# Allegro board C000PD028-HI3521DV200-CUSTOM-A01.brd
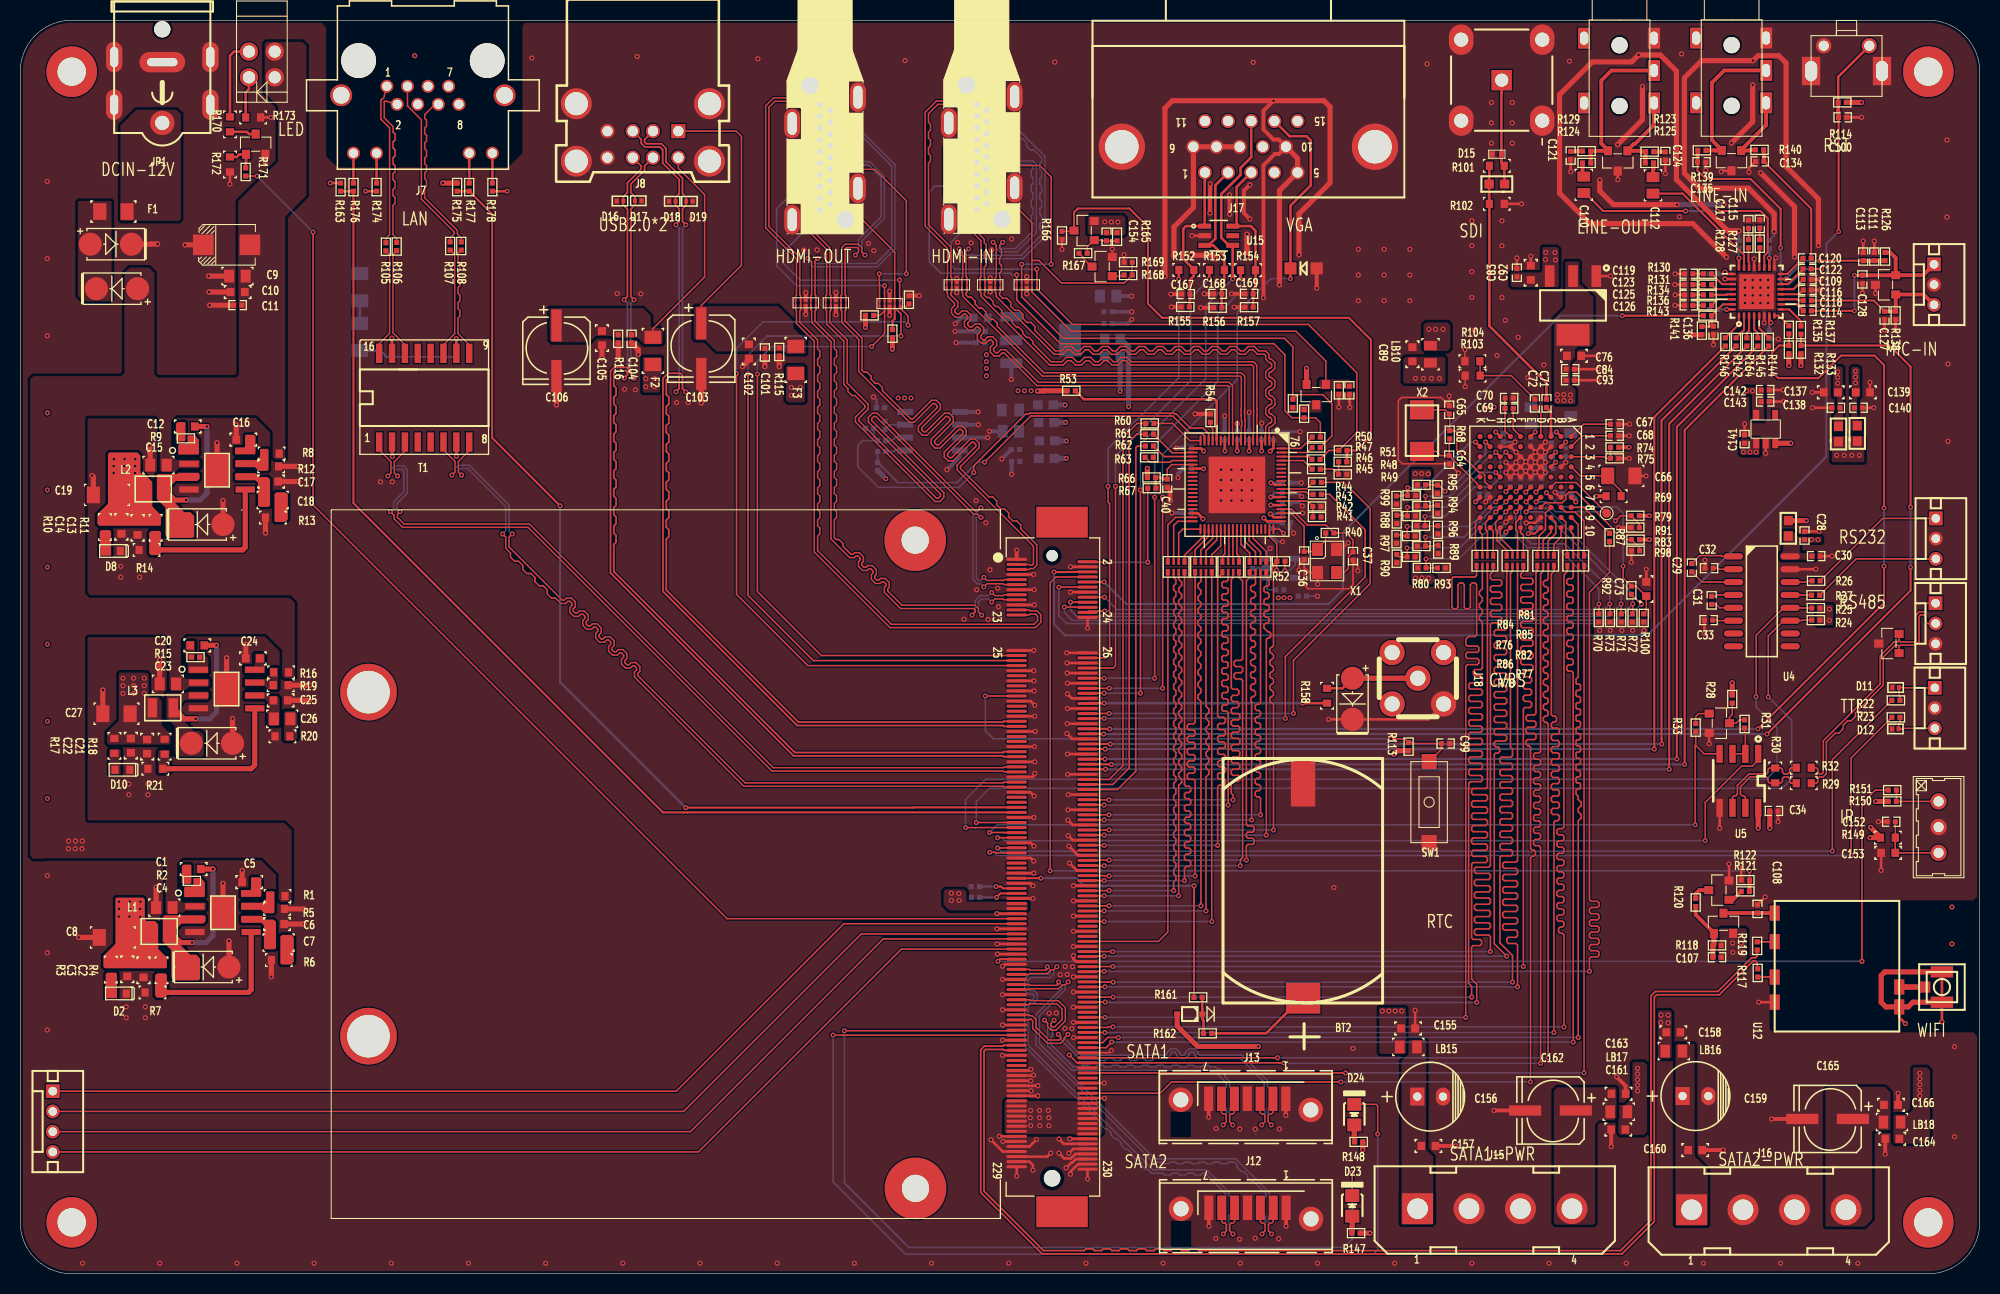
[diagram p0: board, top side]
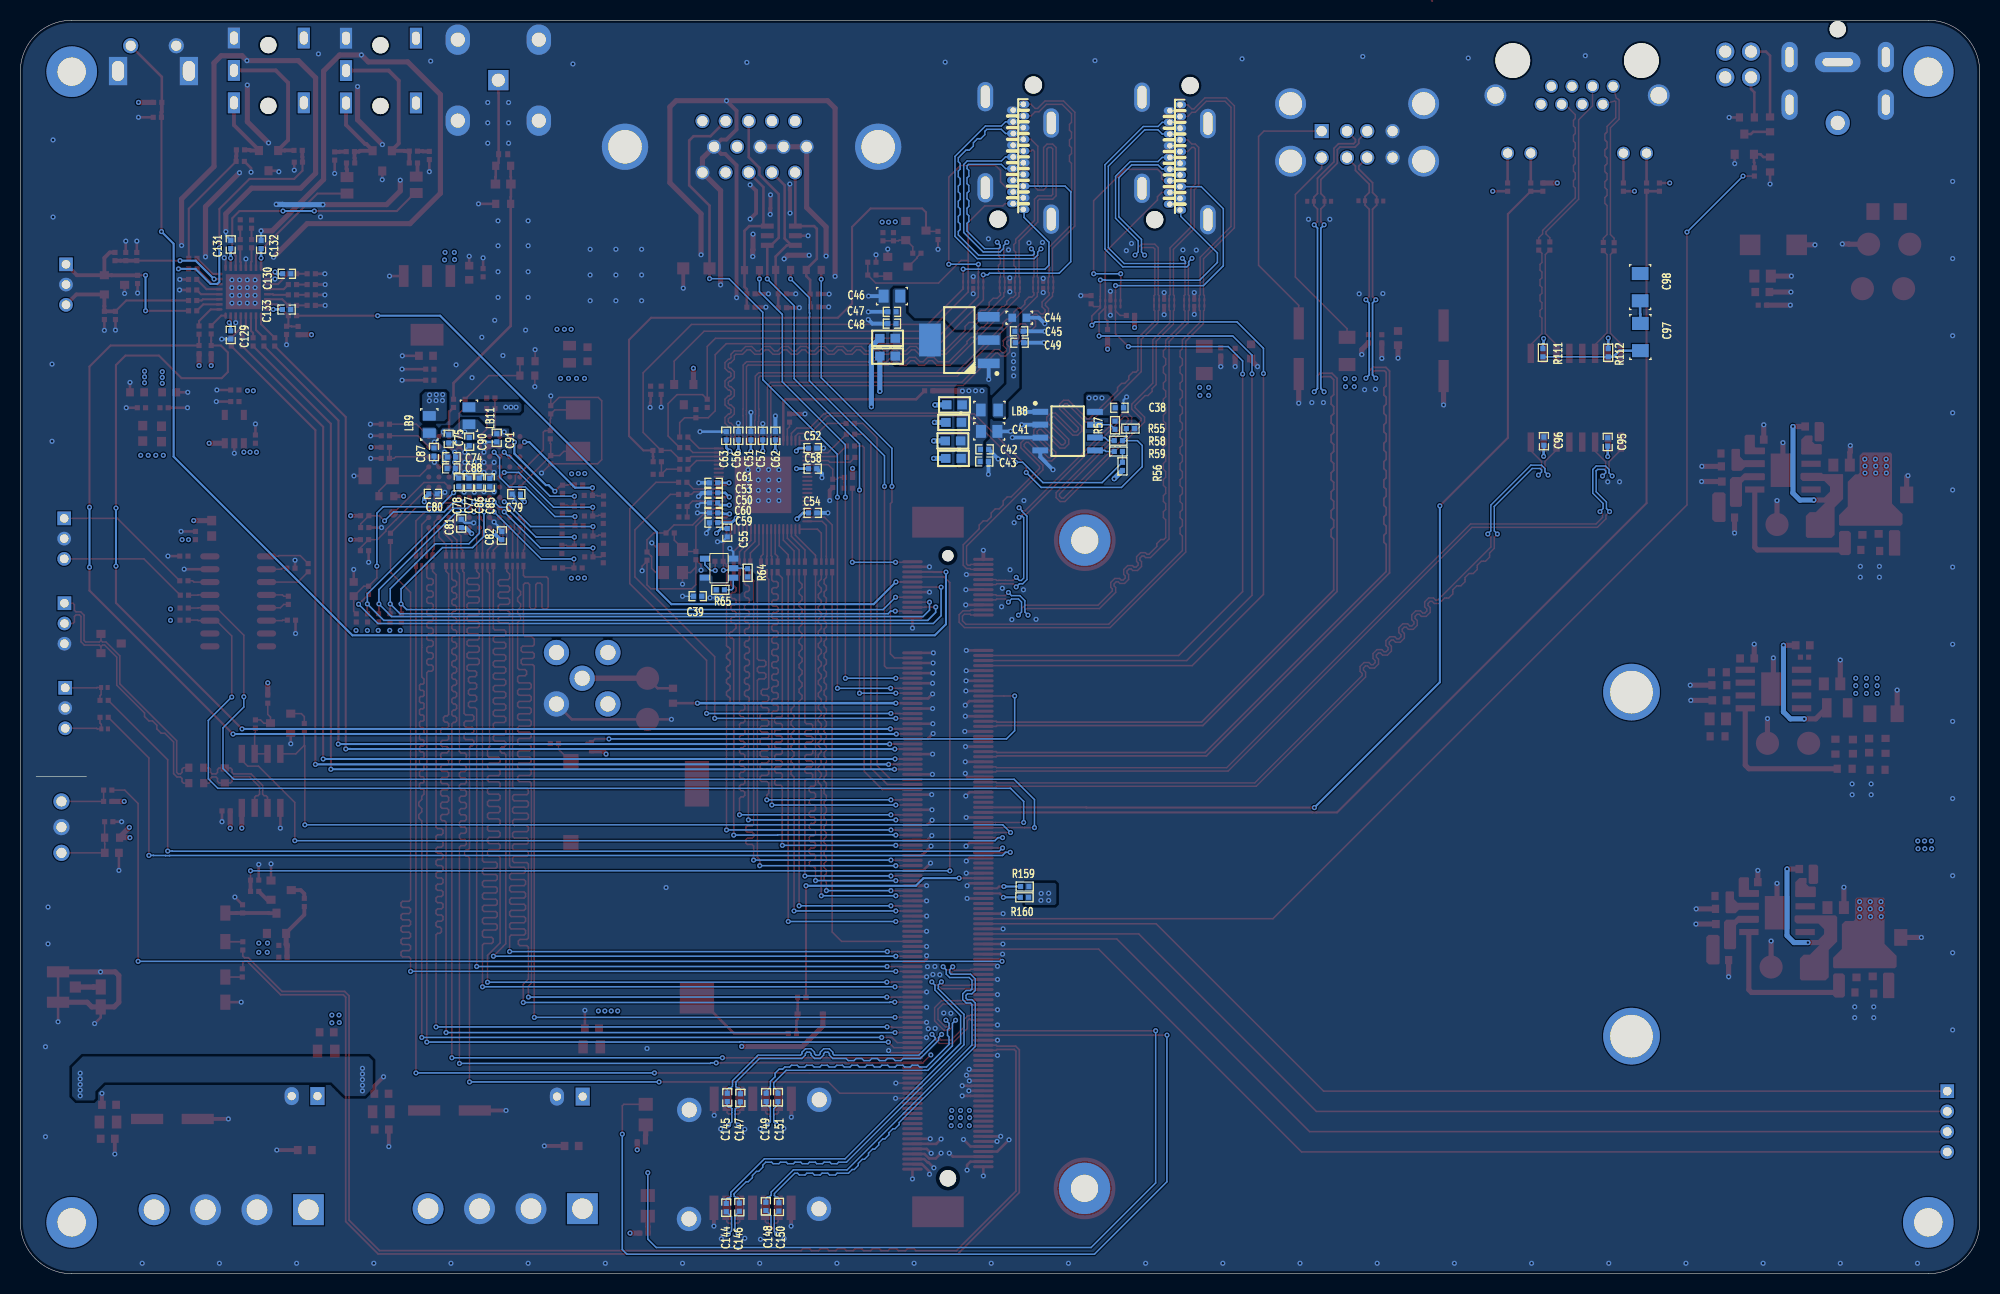
[diagram p1: board, bottom side, seen from below]

Outline 193.45 x 123.83 mm; copper layers: TOP, G, P, BOTTOM. Coordinates in mm from the lower left corner of the outline.
Outline path: 0,118.75 arc(1.49,122.34) 5.08,123.83 188.37,123.83 arc(191.96,122.34) 193.45,118.75 193.45,5.08 arc(191.96,1.49) 188.37,0 5.08,0 arc(1.49,1.49) 0,5.08 0,118.75

## Design rules (mm)
net group 485_A: nets 485_A N16805039
net group 485_B: nets 485_B N16805043
net group GPIO0_6: nets GPIO0_6 N16806861
net group MIPI_RX0_CKN/VI0_DATA5: nets MIPI_RX0_CKN/VI0_DATA5 VI0_DATA5
net group MIPI_RX0_CKP/VI0_DATA6: nets MIPI_RX0_CKP/VI0_DATA6 VI0_DATA6
net group MIPI_RX0_D0N/VI0_DATA1: nets MIPI_RX0_D0N/VI0_DATA1 VI0_DATA1
net group MIPI_RX0_D0P/VI0_DATA2: nets MIPI_RX0_D0P/VI0_DATA2 VI0_DATA2
net group MIPI_RX0_D1P/VI0_DATA0: nets MIPI_RX0_D1P/VI0_DATA0 VI0_DATA0
net group MIPI_RX0_D2N/VI0_DATA7: nets MIPI_RX0_D2N/VI0_DATA7 VI0_DATA7
net group MIPI_RX0_D3N/VI0_DATA3: nets MIPI_RX0_D3N/VI0_DATA3 VI0_DATA3
net group MIPI_RX0_D3P/VI0_DATA4: nets MIPI_RX0_D3P/VI0_DATA4 VI0_DATA4
net group MIPI_RX1_CKN/VI1_DATA6: nets MIPI_RX1_CKN/VI1_DATA6 VI1_DATA6
net group MIPI_RX1_CKP/VI1_DATA5: nets MIPI_RX1_CKP/VI1_DATA5 VI1_DATA5
net group MIPI_RX1_D0N/VI1_DATA2: nets MIPI_RX1_D0N/VI1_DATA2 VI1_DATA2
net group MIPI_RX1_D0P/VI1_DATA1: nets MIPI_RX1_D0P/VI1_DATA1 VI1_DATA1
net group MIPI_RX1_D1N/VI1_DATA0: nets MIPI_RX1_D1N/VI1_DATA0 VI1_DATA0
net group MIPI_RX1_D2P/VI1_DATA7: nets MIPI_RX1_D2P/VI1_DATA7 VI1_DATA7
net group MIPI_RX1_D3N/VI1_DATA4: nets MIPI_RX1_D3N/VI1_DATA4 VI1_DATA4
net group MIPI_RX1_D3P/VI1_DATA3: nets MIPI_RX1_D3P/VI1_DATA3 VI1_DATA3
net group MIPI_RX2_CKN/VI2_DATA5: nets MIPI_RX2_CKN/VI2_DATA5 N16726779
net group MIPI_RX2_CKP/VI2_DATA6: nets MIPI_RX2_CKP/VI2_DATA6 N16726819
net group MIPI_RX2_D0N/VI2_DATA1: nets MIPI_RX2_D0N/VI2_DATA1 N16726767
net group MIPI_RX2_D0P/VI2_DATA2: nets MIPI_RX2_D0P/VI2_DATA2 N16726815
net group MIPI_RX2_D1P/VI2_DATA0: nets MIPI_RX2_D1P/VI2_DATA0 N16726827
net group MIPI_RX3_CKN/VI3_DATA4: nets MIPI_RX3_CKN/VI3_DATA4 N16726807
net group MIPI_RX3_CKP/VI3_DATA3: nets MIPI_RX3_CKP/VI3_DATA3 N16726799
net group MIPI_RX3_D0N/VI3_DATA6: nets MIPI_RX3_D0N/VI3_DATA6 N16726803
net group MIPI_RX3_D0P/VI3_DATA5: nets MIPI_RX3_D0P/VI3_DATA5 N16726847
net group MIPI_RX3_D1N/VI3_DATA2: nets MIPI_RX3_D1N/VI3_DATA2 N16726859
net group MIPI_RX3_D1P/VI3_DATA1: nets MIPI_RX3_D1P/VI3_DATA1 N16726855
net group N16806859: nets N16806859 N16806863
net group N16817084: nets N16817084 N16817150
net group N16817088: nets N16817088 N16817154
net group N17002616: nets N17002616 N17002648
net group RXA_5V: nets N17002664 RXA_5V
net group SATA_RXM0: nets SATA_RM0 SATA_RXM0
net group SATA_RXM1: nets SATA_RM1 SATA_RXM1
net group SATA_RXP0: nets SATA_RP0 SATA_RXP0
net group SATA_RXP1: nets SATA_RP1 SATA_RXP1
net group SATA_TXM0: nets SATA_TM0 SATA_TXM0
net group SATA_TXM1: nets SATA_TM1 SATA_TXM1
net group SATA_TXP0: nets SATA_TP0 SATA_TXP0
net group SATA_TXP1: nets SATA_TP1 SATA_TXP1
net group USB2_1_DM: nets N16806578 USB2_1_DM
net group USB2_1_DP: nets N16806576 USB2_1_DP
net group VI2_CLK: nets N16726843 VI2_CLK
net group VI2_DATA3: nets N16726771 VI2_DATA3
net group VI2_DATA4: nets N16726775 VI2_DATA4
net group VI2_DATA7: nets N16726823 VI2_DATA7
net group VI3_DATA0: nets N16726811 VI3_DATA0
net group VI3_DATA7: nets N16726851 VI3_DATA7
net group HDMI: nets MIPI_RX0_D1N/VI0_CLK
net group HDMI_RX: nets RXA0_N RXA0_P RXA1_N RXA1_P RXA2_N RXA2_P RXAC_N RXAC_P
net group HDMI_TX: nets TXA0_N TXA0_P TXA1_N TXA1_P TXA2_N TXA2_P TXAC_N TXAC_P
net group MDI_AN: nets 6 MDI_AN TX-1
net group MDI_AP: nets 3 MDI_AP TX+1
net group MDI_BN: nets 2 MDI_BN RX-1
net group MDI_BP: nets 1 MDI_BP RX+1

## Placement (name value [footprint] x y rotation side)
ANT1  ipex  [IPEX]  189.71 28.32 180 top
BT2  CR2032_BS-8  [CR2032-SMT]  126.64 38.8 270 top
C1  10nF  [SC0603]  17.12 39.98 0 top
C2  22uF  [SC0603]  12.17 29.97 270 top
C3  100nF  [SC0603]  10.57 30.07 270 top
C4  22uF 25V  [SC0805]  14.22 36.17 180 top
C5  100nF  [SC0603]  22.61 38.68 180 top
C6  100nF  [SC0603]  25.35 34.54 0 top
C7  5.6nF  [SC0805]  25.5 32.72 0 top
C8  47uF  [SC1206]  9.14 33.22 180 top
C9  22uF 25V  [SC0805]  21.44 98.55 180 top
C10  4.7uF 25V  [SC0603]  21.46 96.98 180 top
C11  100nF 25V  [SC0402]  21.46 95.68 180 top
C12  10nF  [SC0603]  16.54 83.69 0 top
C13  22uF  [SC0603]  11.58 73.69 270 top
C14  100nF  [SC0603]  9.98 73.79 270 top
C15  22uF 25V  [SC0805]  13.64 79.88 180 top
C16  100nF  [SC0603]  22.02 82.4 180 top
C17  100nF  [SC0603]  24.77 78.26 0 top
C18  5.6nF  [SC0805]  24.92 76.43 0 top
C19  47uF  [SC1206]  8.56 76.94 180 top
C20  10nF  [SC0603]  17.48 62.08 0 top
C21  22uF  [SC0603]  12.52 52.07 270 top
C22  100nF  [SC0603]  10.92 52.17 270 top
C23  22uF 25V  [SC0805]  14.58 58.27 180 top
C24  100nF  [SC0603]  22.96 60.78 180 top
C25  100nF  [SC0603]  25.7 56.64 0 top
C26  5.6nF  [SC0805]  25.86 54.81 0 top
C27  47uF  [SC1206]  9.5 55.32 180 top
C28  100nf  [SC0402]  176.15 72.92 270 top
C29  100nf  [SC0402]  165.02 69.75 90 top
C30  100nf  [SC0402]  177.29 70.89 0 top
C31  100nf  [SC0402]  166.98 66.52 90 top
C32  100nf  [SC0402]  166.73 69.7 180 top
C33  100nf  [SC0402]  166.67 64.57 180 top
C34  100NF  [SC0402]  173.13 45.72 0 top
C35  10uF  [C0402]  131.22 87.27 270 top
C36  15pF  [SC0402]  126.75 70.94 90 top
C37  15pF  [SC0402]  131.57 70.89 90 top
C38  100nf  [SC0402]  84.94 85.55 0 bottom
C39  100nf  [SC0402]  126.57 66.93 0 bottom
C40  1UF  [SC0402]  113.23 78.08 270 top
C41  22UF  [SC0805]  97.79 83.21 180 bottom
C42  100nf  [SC0402]  98.25 81.44 180 bottom
C43  1UF  [SC0402]  98.27 80.24 180 bottom
C44  10UF  [SC0603]  94.82 94.44 180 bottom
C45  100nf  [SC0402]  94.84 93.09 180 bottom
C46  22UF  [SC0805]  107.39 96.57 0 bottom
C47  1UF  [SC0402]  107.39 95.02 0 bottom
C48  100nf  [SC0402]  107.39 93.86 0 bottom
C49  100nf  [SC0402]  94.79 91.98 180 bottom
C50  100nf  [SC0402]  124.99 76.15 0 bottom
C51  100nf  [SC0402]  121.31 82.78 90 bottom
C52  100nf  [SC0402]  115.21 81.56 180 bottom
C53  100nf  [SC0402]  124.99 77.14 0 bottom
C54  100nf  [SC0402]  115.21 75.16 180 bottom
C55  100nf  [SC0402]  123.65 73.2 270 bottom
C56  100nf  [SC0402]  122.56 82.78 90 bottom
C57  100nf  [SC0402]  120.14 82.78 90 bottom
C58  100nf  [SC0402]  115.21 79.53 180 bottom
C59  100nf  [SC0402]  124.99 74.19 0 bottom
C60  100nf  [SC0402]  124.99 75.16 0 bottom
C61  100nf  [SC0402]  124.99 78.13 0 bottom
C62  100nf  [SC0402]  118.9 82.78 90 bottom
C63  100nf  [SC0402]  123.75 82.78 90 bottom
C64  8pF  [SC0402]  141.07 80.42 90 top
C65  8pF  [SC0402]  141.07 85.34 270 top
C66  33uF/10V  [SC1206]  158.06 78.82 0 top
C67  1UF  [SC0402]  157.4 83.92 0 top
C68  47NF  [SC0402]  157.4 82.78 0 top
C69  470NF  [SC0402]  146.99 85.47 180 top
C70  470NF  [SC0402]  146.99 86.51 0 top
C71  1UF  [SC0402]  150.67 85.98 90 top
C72  1UF  [SC0402]  149.53 85.98 90 top
C73  10UF  [SC0603]  160.53 67.64 90 top
C74  100nf  [SC0402]  150.88 80.67 180 bottom
C75  100nf  [SC0402]  151.16 82.47 270 bottom
C76  10UF  [SC0603]  153.39 90.68 0 top
C77  100nf  [SC0402]  149.15 78.18 90 bottom
C78  100nf  [SC0402]  150.16 78.18 90 bottom
C79  100nf  [SC0402]  144.48 77.01 0 bottom
C80  100nf  [SC0402]  152.7 77.04 180 bottom
C81  100nf  [SC0402]  149.91 74.12 90 bottom
C82  100nf  [SC0402]  145.9 72.92 90 bottom
C83  100nf  [SC0402]  147.75 98.88 90 top
C84  1UF  [SC0402]  153.01 89.36 0 top
C85  100nf  [SC0402]  147.09 78.16 90 bottom
C86  100nf  [SC0402]  148.13 78.18 90 bottom
C87  100nf  [SC0402]  152.6 81.18 270 bottom
C88  100nf  [SC0402]  150.9 79.55 180 bottom
C89  10UF  [SC0603]  137.44 90.83 90 top
C90  100nf  [SC0402]  149.12 82.19 270 bottom
C91  100nf  [SC0402]  146.41 82.58 270 bottom
C92  10UF  [SC0603]  149.12 98.88 90 top
C93  100nf  [SC0402]  153.01 88.27 0 top
C95  100nf  [SC0402]  36.73 82.17 270 bottom
C96  100nf  [SC0402]  43.03 82.25 270 bottom
C97  1NF/2KV  [SC1206]  33.5 92.53 270 bottom
C98  1NF/2KV  [SC1206]  33.53 97.46 270 bottom
C99  100nf  [SC0402]  140.72 52.37 0 top
C100  100nf  [SC0402]  179.91 114.24 0 top
C101  100nf  [SC0402]  73.51 91.01 270 top
C102  10UF  [SC0603]  71.93 91.11 270 top
C103  100UF/25V  [SAC6666]  67.23 91.38 270 top
C104  100nf  [SC0402]  60.35 92.35 270 top
C105  10UF  [SC0603]  57.43 92.43 270 top
C106  100UF/25V  [SAC6666]  52.93 91.18 270 top
C107  1UF  [SC0402]  167.51 31.27 180 top
C108  100nf  [SC0402]  171.5 36.04 90 top
C109  1UF  [SC0402]  176.43 98.22 0 top
C110  22UF  [SC0805]  154.36 107.57 90 top
C111  4.7uF  [SC0402]  183.03 100.48 90 top
C112  22UF  [SC0805]  161.19 107.52 90 top
C113  100nf  [SC0402]  181.94 100.48 90 top
C114  1UF  [SC0402]  176.43 95.12 0 top
C115  100nf  [SC0402]  171.73 103.71 270 top
C116  1UF  [SC0402]  176.43 97.18 0 top
C117  100nf  [SC0402]  170.61 103.68 270 top
C118  1UF  [SC0402]  176.43 96.14 0 top
C119  100nf  [SC0402]  164.72 98.78 0 top
C120  1UF  [SC0402]  176.4 100.3 0 top
C121  1NF  [SC0402]  153.06 110.46 270 top
C122  1UF  [SC0402]  176.4 99.26 0 top
C123  100nf  [SC0402]  164.72 97.71 0 top
C124  1NF  [SC0402]  162.41 110.41 270 top
C125  100nf  [SC0402]  164.72 96.7 0 top
C126  100nf  [SC0402]  164.72 95.66 0 top
C127  18pF  [SC0402]  184.05 94.67 270 top
C128  18pF  [SC0402]  181.86 98.22 270 top
C129  100nf  [SC0402]  172.67 92.74 270 bottom
C130  100nf  [SC0402]  167.13 98.78 180 bottom
C131  100nf  [SC0402]  172.67 101.68 90 bottom
C132  100nf  [SC0402]  169.67 101.68 90 bottom
C133  100nf  [SC0402]  167.16 95.25 180 bottom
C134  47pF  [SC0402]  171.73 109.88 180 top
C135  47pF  [SC0402]  165.99 109.8 0 top
C136  100nf  [SC0402]  167.16 93.19 270 top
C137  10UF  [SC0603]  178.74 87.07 180 top
C138  100nf  [SC0402]  179.25 85.55 180 top
C139  10UF  [SC0603]  181.91 87.07 0 top
C140  100nf  [SC0402]  181.48 85.55 0 top
C141  100nf  [SC0402]  170.23 82.45 90 top
C142  1UF  [SC0402]  172.26 87.3 0 top
C143  100nf  [SC0402]  172.26 86.16 0 top
C144  10NF  [SC0402]  123.75 6.53 270 bottom
C145  10NF  [SC0402]  123.65 17.42 270 bottom
C146  10NF  [SC0402]  122.45 6.58 270 bottom
C147  10NF  [SC0402]  122.35 17.37 270 bottom
C148  10NF  [SC0402]  119.84 6.65 270 bottom
C149  10NF  [SC0402]  119.81 17.42 270 bottom
C150  10NF  [SC0402]  118.54 6.6 270 bottom
C151  10NF  [SC0402]  118.64 17.42 270 bottom
C152  100NF  [SC0402]  184.71 44.65 180 top
C153  10UF  [SC0603]  184.4 41.58 180 top
C154  1UF  [SC0402]  107.24 102.44 270 top
C155  10NF  [SC0603]  137.01 24.23 0 top
C156  100UF  [CAPC2-100-250]  137.92 17.5 0 top
C157  10NF  [SC0603]  139.01 12.62 0 top
C158  10NF  [SC0603]  163.19 23.85 0 top
C159  100UF  [CAPC2-100-250]  164.11 17.55 0 top
C160  10NF  [SC0603]  165.35 12.22 0 top
C161  10NF  [SC0603]  157.76 14.25 180 top
C162  100UF  [SAC6666]  151.07 16.13 180 top
C163  10NF  [SC0603]  157.78 17.78 0 top
C164  10NF  [SC0603]  184.81 13.34 180 top
C165  100UF  [SAC6666]  178.42 15.29 180 top
C166  10NF  [SC0603]  184.68 16.69 0 top
C167  4PF/NC*  [SC0402]  115.06 96.77 180 top
C168  4PF/NC*  [SC0402]  118.21 96.8 180 top
C169  4PF/NC*  [SC0402]  121.31 96.8 180 top
D1  SS16  [SMA]  18.57 30.3 180 top
D2  LED-GREEN-0603  [LED0603]  9.73 27.69 180 top
D3  SS36-A  [SMA]  9.55 97.31 180 top
D4  SS36-A  [SMA]  8.94 101.7 0 top
D5  SMBJ16CA  [SMB]  20.37 101.64 180 top
D6  LED2-3  [DIP_LEDX2]  23.85 120.73 90 top
D7  SS16  [SMA]  17.98 74.02 180 top
D8  LED-GREEN-0603  [LED0603]  9.14 71.4 180 top
D9  SS16  [SMA]  18.92 52.4 180 top
D10  LED-GREEN-0603  [LED0603]  10.08 49.78 180 top
D11  NC  [HSOD882]  185.14 57.91 180 top
D12  NC  [HSOD882]  185.12 53.82 180 top
D13  psot12c  [SOT23]  184.48 62.26 90 top
D14  BAT54C  [SOT23]  127.94 86.84 180 top
D15  RCLAMP0531T  [TVS0402]  145.77 110.59 180 top
D16  ESD8V0R1B_02LRH  [HSOD882]  59.21 105.97 180 top
D17  ESD8V0R1B_02LRH  [HSOD882]  61.01 105.99 0 top
D18  ESD8V0R1B_02LRH  [HSOD882]  64.36 105.94 180 top
D19  ESD8V0R1B_02LRH  [HSOD882]  66.07 105.94 0 top
D20  SM12T1G  [SOT23]  157.71 109.93 180 top
D21  SM12T1G  [SOT23]  184.14 97.69 90 top
D22  SM12T1G  [SOT23]  168.94 109.96 180 top
D23  LED  [SD0805-LED]  131.5 6.71 90 top
D24  LED  [SD0805-LED]  131.7 15.72 90 top
D25  SPD9103W  [SOD-323]  126.7 99.31 0 top
D26  SPD9241A  [SMA]  131.52 56.79 270 top
D27  B5817WS  [SOD323]  115.46 25.65 180 top
ESD1  Rclamp0524  [DFN2510]  92.46 97.69 0 top
ESD2  Rclamp0524  [DFN2510]  77.55 95.91 0 top
ESD3  Rclamp0524  [DFN2510]  95.76 97.69 0 top
ESD4  Rclamp0524  [DFN2510]  80.52 95.91 0 top
ESD5  Rclamp0524  [DFN2510]  99.36 97.69 0 top
ESD6  Rclamp0524  [DFN2510]  85.83 95.83 0 top
F1  SF-1206F400  [SF1206]  9.19 104.93 180 top
F2  MF-NSMF150  [SF1206]  62.46 91.16 90 top
F3  MF-NSMF150  [SF1206]  76.56 90.27 90 top
H1  D5-M2.5  [HOLE5C2_8MM]  188.37 118.75 0 top
H2  D5-M2.5  [HOLE5C2_8MM]  5.08 5.08 0 top
H3  D5-M2.5  [HOLE5C2_8MM]  5.08 118.75 0 top
H4  D5-M2.5  [HOLE5C2_8MM]  188.37 5.08 0 top
J1  PH2.0-3P_180  [CON1X3PD2]  189.01 57.88 270 top
J2  -  [PH-3P]  189.11 74.62 270 top
J3  PH-3P  [CON1X3PD2]  189.09 66.24 270 top
J4  HDMI_A  [HDMI_19P-QJ3119CH16_4A]  94.92 115.77 270 top
J5  HDMI_A  [HDMI_19P-QJ3119CH16_4A]  79.45 115.71 270 top
J6  BNC  [BNC_73171-0700]  146.25 117.91 0 top
J7  MJ8-SL  [MJ8-SRLFY]  36.2 117.3 0 top
J8  Molex_0672983090  [USB8-1715]  64.97 112.87 180 top
J9  -  [PJ-313]  157.89 121.35 180 top
J10  PH2.0-3P_180  [CON1X3PD2]  188.93 99.71 270 top
J11  -  [PJ-313]  168.95 121.37 180 top
J12  SIP7S2  [SATA7-M-A]  121.01 5.69 180 top
J13  SIP7S2  [SATA7-M-A]  120.98 16.46 180 top
J14  HS0038B  [CON3X1]  189.38 44.12 270 top
J15  SIP4  [SIP-4P-200]  145.57 6.3 0 top
J16  SIP4  [SIP-4P-200]  172.62 6.2 0 top
J17  DB15-3M2  [DB15-3RF-A]  116.95 108.79 180 top
J18  RCA2_A  [SMA_KE_180_CVBS]  137.97 58.83 180 top
J19  CON4/NC  [PH-4P]  3.21 18.04 270 top
JP1  DC-5521  [DC552X]  14.02 119.69 0 top
L1  4.7uH  [HSL1008]  13.72 33.81 180 top
L2  4.7uH  [HSL1008]  13.13 77.52 180 top
L3  4.7uH  [HSL1008]  14.07 55.91 180 top
L4  6.2nH  [SL0603]  145.77 107.65 180 top
LB1  BLM18PG121SN1D  [SL0603]  174.55 73.63 270 top
LB2  BLM18PG121SN1D  [SL0603]  101.22 85.83 0 bottom
LB3  BLM18PG121SN1D  [SL0603]  107.82 90.65 0 bottom
LB4  BLM18PG121SN1D  [SL0603]  101.37 82.27 0 bottom
LB5  BLM18PG121SN1D  [SL0603]  107.82 92.41 0 bottom
LB6  BLM18PG121SN1D  [SL0603]  101.32 80.54 0 bottom
LB7  BLM18PG121SN1D  [SL0603]  101.3 84.1 0 bottom
LB8  LFBK2125HS101_T  [SL0805]  97.77 85.32 0 bottom
LB9  MGLB2012_220T_LF  [SL0805]  153.06 83.9 270 bottom
LB10  MGLB2012_220T_LF  [SL0805]  139.22 90.83 270 top
LB11  MGLB2012_220T_LF  [SL0805]  149.15 84.76 270 bottom
LB12  BLM18PG121SN1D  [SL0603]  179.5 82.96 90 top
LB13  BLM18PG121SN1D  [SL0603]  181.36 83.01 90 top
LB15  LB  [SL0805]  137.03 22.4 0 top
LB16  LB  [SL0805]  163.25 22 0 top
LB17  LB  [SL0805]  157.81 16 180 top
LB18  LB  [SL0805]  184.78 14.99 180 top
NOREF  -  []  188.21 0 90 top
NOREF#2  -  []  0 118.95 0 top
Q1  BC847ALT1/NPN  [SOT23]  167.74 54.38 270 top
Q2  IRLML5203TR  [SOT23]  168.15 34.62 0 top
Q3  BC847ALT1/NPN  [SOT23]  167.69 37.9 90 top
Q4  IRLML5203TR  [SOT23]  105.03 103.05 90 top
Q5  BC847ALT1/NPN  [SOT23]  106.81 99.49 90 top
Q6  BC847ALT1/NPN  [SOT23]  23.24 111.58 0 top
R1  10K  [SR0603]  25.4 37.31 180 top
R2  10R  [SR0402]  16.94 38.81 180 top
R3  10K  [SR0603]  8.94 30.05 270 top
R4  50K  [SR0603]  13.94 29.97 90 top
R5  4.7K  [SR0603]  25.35 36.04 0 top
R6  10K  [SR0603]  25.53 30.99 180 top
R7  16K  [SR0603]  13.06 27.79 180 top
R8  10K  [SR0603]  24.82 81.03 180 top
R9  10R  [SR0402]  16.36 82.52 180 top
R10  10K  [SR0603]  8.36 73.76 270 top
R11  50K  [SR0603]  13.36 73.69 90 top
R12  4.7K  [SR0603]  24.77 79.76 0 top
R13  10K  [SR0603]  24.94 74.7 180 top
R14  16K  [SR0603]  12.47 71.5 180 top
R15  10R  [SR0402]  17.3 60.91 180 top
R16  10K  [SR0603]  25.76 59.41 180 top
R17  10K  [SR0603]  9.3 52.15 270 top
R18  147K  [SR0603]  14.25 52.07 90 top
R19  4.7K  [SR0603]  25.7 58.14 0 top
R20  10K  [SR0603]  25.88 53.09 180 top
R21  28K  [SR0603]  13.34 49.89 180 top
R22  33R  [SR0402]  185.17 56.64 0 top
R23  33R  [SR0402]  185.17 54.97 0 top
R24  4.7K  [SR0402]  177.27 64.57 180 top
R25  4.7K  [SR0402]  177.27 65.76 180 top
R26  100R  [SR0402]  177.29 68.45 0 top
R27  100R  [SR0402]  177.24 67.03 0 top
R28  10K  [SR0402]  169.01 56.77 90 top
R29  10R  [SR0603]  176.07 48.46 0 top
R30  120R/NC  [SR0603]  173.25 49.23 270 top
R31  0R  [SR0402]  170.23 54.31 270 top
R32  10R  [SR0603]  176.07 49.99 0 top
R33  1K 1%  [SR0402]  165.4 53.95 90 top
R34  10K  [R0402]  130.18 87.27 90 top
R35  47K  [R0402]  125.63 85.98 270 top
R36  47K  [R0402]  126.75 84.96 90 top
R37  2K  [R0402]  86.11 92.86 270 top
R38  2K  [R0402]  83.85 94.67 180 top
R39  10K  [R0402]  87.73 96.22 90 top
R40  1M  [SR0402]  129.29 73.18 0 top
R41  0R  [SR0402]  128.02 74.75 180 top
R42  NC  [SR0402]  128.02 75.79 0 top
R43  0R  [SR0402]  128.04 76.99 180 top
R44  0R  [SR0402]  128.04 78.18 180 top
R45  0R  [SR0402]  127.94 79.48 180 top
R46  0R  [SR0402]  127.91 80.44 180 top
R47  0R  [SR0402]  127.94 81.61 180 top
R48  4.7K  [SR0402]  130.56 80.21 180 top
R49  10K  [SR0402]  130.56 78.97 0 top
R50  0R  [SR0402]  127.94 82.65 180 top
R51  1K  [SR0402]  130.58 81.33 180 top
R52  NC  [SR0402]  124.46 70.38 0 top
R53  27K  [SR0402]  103.76 87.22 0 top
R54  2K  [SR0402]  117.5 84.53 270 top
R55  4.7K  [SR0402]  83.85 83.49 0 bottom
R56  4.7K  [SR0402]  84.63 79.76 90 bottom
R57  4.7K  [SR0402]  85.37 83.82 90 bottom
R58  0R  [SR0402]  85.04 82.3 180 bottom
R59  0R  [SR0402]  85.04 81.23 180 bottom
R60  0R  [SR0402]  111.51 84 0 top
R61  0R  [SR0402]  111.48 82.93 0 top
R62  0R  [SR0402]  111.48 81.76 0 top
R63  0R  [SR0402]  111.46 80.65 180 top
R64  10K  [SR0402]  121.64 69.24 270 bottom
R65  10K  [SR0402]  124.33 67.56 0 bottom
R66  10K  [SR0402]  111.68 78.66 180 top
R67  0R  [SR0402]  111.71 77.6 180 top
R68  1M  [SR0402]  141.12 82.88 90 top
R69  105R  [SR0603]  157.3 76.81 0 top
R70  4.7K  [SR0402]  155.83 64.78 90 top
R71  4.7K  [SR0402]  158.05 64.78 90 top
R72  4.7K  [SR0402]  159.16 64.78 90 top
R73  4.7K  [SR0402]  156.94 64.78 90 top
R74  NC  [SR0402]  157.4 81.64 180 top
R75  NC  [SR0402]  157.4 80.54 180 top
R76  4.7K  [SR0402]  137.34 74.85 180 top
R77  NC/4.7K  [SR0402]  138.33 71.88 0 top
R78  4.7K  [SR0402]  137.31 70.82 180 top
R79  NC/4.7K  [SR0402]  159.44 74.88 180 top
R80  NC/4.7K  [SR0402]  138.38 69.72 0 top
R81  NC/4.7K  [SR0402]  138.33 77.93 0 top
R82  4.7K  [SR0402]  138.28 73.89 0 top
R83  NC/4.7K  [SR0402]  159.46 72.52 180 top
R84  NC/4.7K  [SR0402]  137.36 76.89 180 top
R85  4.7K  [SR0402]  138.33 75.84 0 top
R86  4.7K  [SR0402]  137.31 72.87 180 top
R87  0R  [SR0402]  156.9 72.75 270 top
R88  NC/4.7K  [SR0402]  135.89 74.52 270 top
R89  NC/4.7K  [SR0402]  139.98 71.55 270 top
R90  NC/4.7K  [SR0402]  135.89 70.64 270 top
R91  4.7K  [SR0402]  159.44 73.71 180 top
R92  0R  [SR0402]  159.05 67.51 90 top
R93  NC/4.7K  [SR0402]  140.31 69.72 0 top
R94  NC/4.7K  [SR0402]  139.93 75.51 270 top
R95  4.7K  [SR0402]  139.9 77.5 270 top
R96  NC/4.7K  [SR0402]  139.95 73.48 270 top
R97  NC/4.7K  [SR0402]  135.86 72.57 270 top
R98  4.7K  [SR0402]  159.46 71.42 180 top
R99  4.7K  [SR0402]  135.86 76.43 270 top
R100  10K  [SR0402]  160.27 64.78 90 top
R101  75R  [SR0603]  145.77 109.45 180 top
R102  75R  [SR0603]  145.77 105.69 0 top
R103  75R  [SR0603]  143.38 88.72 180 top
R104  75R  [SR0603]  143.36 90.14 180 top
R105  2R  [SR0402]  36.09 101.45 90 top
R106  2R  [SR0402]  37.16 101.47 90 top
R107  2R  [SR0402]  42.44 101.52 90 top
R108  2R  [SR0402]  43.54 101.52 90 top
R111  75R  [SR0402]  43.13 90.98 270 bottom
R112  75R  [SR0402]  36.68 90.98 270 bottom
R113  4.7K  [SR0402]  137.06 52.07 90 top
R114  4.7K  [SR0402]  179.88 115.71 180 top
R115  100K  [SR0402]  74.93 91.06 270 top
R116  100K  [SR0402]  59.03 92.35 270 top
R117  0R  [SR0402]  171.53 29.72 270 top
R118  2K  [SR0402]  167.51 32.44 180 top
R119  0R  [SR0402]  171.48 32.39 90 top
R120  100R  [SR0402]  165.4 36.68 90 top
R121  1K  [SR0402]  170.31 37.77 180 top
R122  1K  [SR0402]  170.31 38.89 180 top
R123  100R  [SR0402]  160.86 110.85 0 top
R124  10R  [SR0402]  154.64 109.73 0 top
R125  10R  [SR0402]  160.83 109.73 180 top
R126  680R  [SR0402]  184.1 100.48 90 top
R127  10R  [SR0402]  171.73 101.75 90 top
R128  10R  [SR0402]  170.61 101.75 90 top
R129  100R  [SR0402]  154.64 110.9 180 top
R130  10R  [SR0402]  166.57 98.78 180 top
R131  10R  [SR0402]  166.57 97.71 180 top
R132  4.7K  [SR0402]  174.6 91.29 90 top
R133  4.7K  [SR0402]  175.79 91.29 90 top
R134  10R  [SR0402]  166.57 96.7 180 top
R135  0R  [SR0402]  174.6 93.24 90 top
R136  10R  [SR0402]  166.57 95.66 180 top
R137  0R  [SR0402]  175.79 93.22 90 top
R138  680R  [SR0402]  185.14 94.67 270 top
R139  10R  [SR0402]  166.01 110.97 180 top
R140  10R  [SR0402]  171.7 111.02 0 top
R141  100k  [SR0402]  166.01 93.17 90 top
R142  0R  [SR0402]  169.39 92.05 270 top
R143  0R  [SR0402]  166.57 94.64 0 top
R144  0R  [SR0402]  172.62 92.05 270 top
R145  0R  [SR0402]  171.53 92.05 270 top
R146  0R  [SR0402]  168.33 92.05 270 top
R147  1K  [SR0402]  131.88 4.01 180 top
R148  1K  [SR0402]  132.13 13.03 180 top
R149  49.9R  [SR0603]  184.38 43.08 0 top
R150  10K  [SR0402]  184.81 46.66 0 top
R151  33R  [SR0402]  184.81 47.78 180 top
R152  0  [SR0603]  115.11 99.16 0 top
R153  0  [SR0603]  118.14 99.16 0 top
R154  0  [SR0603]  121.21 99.14 0 top
R155  75  [SR0402]  115.01 95.5 180 top
R156  75  [SR0402]  118.21 95.43 180 top
R157  75  [SR0402]  121.31 95.48 180 top
R158  10  [SR0603]  129.01 57.1 90 top
R159  4.7K  [SR0402]  94.28 38.25 180 bottom
R160  4.7K  [SR0402]  94.31 37.19 180 bottom
R161  1K  [SR0402]  116.28 27.3 180 top
R162  1K  [SR0402]  117.22 23.75 0 top
R163  4.7K  [SR0402]  31.62 107.34 270 top
R164  0R  [SR0402]  170.46 92.05 270 top
R165  2K  [SR0402]  108.28 102.44 270 top
R166  10K  [SR0402]  102.84 102.57 270 top
R167  100R  [SR0402]  104.93 100.81 180 top
R168  1K  [SR0402]  109.37 98.65 180 top
R169  1K  [SR0402]  109.37 99.92 180 top
R170  470R  [SR0603]  20.7 113.54 270 top
R171  1K  [SR0402]  22.25 108.84 90 top
R172  10K  [SR0603]  20.7 109.58 270 top
R173  4.7K  [SR0603]  22.99 114.22 0 top
R174  0R  [SR0402]  35.18 107.34 270 top
R175  4.7K  [SR0402]  43.13 107.34 270 top
R176  330R  [SR0402]  32.89 107.34 270 top
R177  330R  [SR0402]  44.32 107.34 270 top
R178  0R  [SR0402]  46.61 107.34 270 top
RN1  0R  [RPAK8-10X25-28V]  122.19 69.82 180 top
RN2  0R  [RPAK8-10X25-28V]  119.5 69.82 180 top
RN3  0R  [RPAK8-10X25-28V]  116.81 69.82 180 top
RN4  0R  [RPAK8-10X25-28V]  114.11 69.82 180 top
RN5  0RX4  [RPAK8-10X25-28V]  150.59 70.43 180 top
RN6  0RX4  [RPAK8-10X25-28V]  153.56 70.43 180 top
RN7  0RX4  [RPAK8-10X25-28V]  147.57 70.43 180 top
RN8  0RX4  [RPAK8-10X25-28V]  144.59 70.43 180 top
S1  SW6X6X4.2_SIDE_90  [SW_90]  180.29 119.81 90 top
SW1  SMT2P-3X6  [SW3X6]  139.09 46.59 90 top
T1  H1102NL  [STFM16-50-285]  39.88 86.54 0 top
TP1  T  [TP]  156.62 75.13 90 top
U1  SGM6132  [SOIC-8]  20.02 35.66 270 top
U2  SGM6132  [SOIC-8]  19.43 79.38 270 top
U3  SGM6132  [SOIC-8]  20.37 57.76 270 top
U4  SP3232EEN  [SOP16]  169.14 70.87 0 top
U5  MAX485ESA  [SOP8-50-150]  169.67 48.69 180 top
U6  LT8619C  [QFN77BH10]  120.12 77.93 270 top
U7  LT24C08/NC  [SOP8]  90.04 83.24 180 bottom
U8  SN74LVC1G126DBV  [SOT23-5]  124.46 69.7 90 bottom
U9  BL1117-18CX  [SOT-223]  100.74 92.23 0 bottom
U10  GV7601  [BGA100P10X10-100N]  148.62 78.21 270 top
U11  BL1117-12CX  [SOT-223]  153.29 95.66 270 top
U12  RTL8188EUS  [DJH-WF-68E]  185.5 23.93 90 top
U13  TLV320AIC3101  [MLF32-050-0505LE]  171.42 97.01 0 top
U14  RT9013-18GB  [SOT23-5]  172.31 83.44 0 top
U15  CLAMP0504DL1HP  [SOT23-6J]  118.31 102.54 270 top
U16  gf_mxm2_p230h6  [AS0B326-S43N_5]  210.27 40.41 270 top
X1  25MHz-WY4P  [XT3225]  129.01 70.41 270 top
X2  NX5032GB-27.000M-STD-CSK-5  [5032]  138.38 83.29 180 top

## Library data of the parts
ANT1 = BNC_0: room: 8
BT2 = BATTERY
C1-C27 = CAP NP: room: 2
C28-C33 = CAP_NP: room: 3
C34 = C: room: 3
C35 = CAP NP: room: 4
C36 C37 = C-0603: room: 5
C38-C63 = CAP_NP: room: 5
C64 C65 = C-0603: room: 6
C66 = CAP POL: room: 6
C67-C93 = CAP_NP: room: 6
C95-C100 = CAP_NP: room: 7
C101 C102 C104 C105 C108 = CAP_NP: room: 8
C103 C106 = CP_1: room: 8
C107 = C: signal model: DEFAULT_CAPACITOR_1e+06pF_1_2; room: 8
C109 C111 C113-C143 = CAP_NP: room: 9
C110 C112 = CAP_TANT: room: 9
C144-C151 = C: signal model: GRM155R71C103KA01D_10NF; room: 10
C152 C153 = C_0: room: 10
C154 = C_1: signal model: DEFAULT_CAPACITOR_1e+06pF_1_2
C155 C157 C158 C160 C161 C163 C164 C166 = C: room: 10
C156 C159 C162 C165 = CP: room: 10
C167-C169 = C: room: 11
D1 D7 D9 = DIODE SCHOTTKY: room: 2
D2 D8 D10 = CCL-CRS10/SM_1: room: 2
D3 D4 = DIODE: room: 2
D5 = DIODE TAZ LC: room: 2
D6 = LED2-3_A_2
D11 D12 = DZ3: room: 3
D13 = D-TVS_0: room: 3
D14 = BAT54C: room: 4
D15 = RCLAMP0521P_1: room: 6
D16-D19 = DZ_L_0: signal model: DZ_L_0_HSOD882_ESD8V0R1B_02LRH_ESD8V0R1B_02LRH; room: 8
D20-D22 = D2-3_D: room: 9
D23 D24 = LED: room: 10
D25 = D4-2: room: 11
D26 = DZ3: room: 11
D27 = D_A: User Part Number: PART#; Tolerance: TOL; room: 12
ESD1-ESD6 = RClamp0514M: room: 4
F1 = FUSE/SM_0: room: 2
F2 F3 = FS-A_0: room: 8
H1-H4 = Hole: room: 12
J1-J3 = CON3: room: 3
J4 J5 = HDMI_A_0: User Part Number: PRAT NUMBER; Tolerance: TOLERANCE; room: 4
J6 = BNC: Tolerance: #TOL; User Part Number: HAMP; room: 6
J7 = MJ8-SL_0
J8 = USB-8: room: 8
J9 J11 = PJ-313_2: room: 9
J10 = CON3: room: 9
J12 J13 = SIP7S2: room: 10
J14 = CON3: room: 10
J15 J16 = SIP4: room: 10
J17 = DB15-3M2_0: room: 11
J18 = RCA2_A: room: 11
J19 = CON4
JP1 = PHONE JACK-O_1: room: 2
L1-L3 = CHOKE: room: 2
L4 = INDUCTOR: room: 6
LB1 = LB: room: 3
LB2-LB7 = LB: room: 5
LB8 = LB_0: room: 5
LB9-LB11 = LB: room: 6
LB12 LB13 = LB: room: 9
LB15-LB18 = LB: room: 10
Q1 = BPW37/TO_0: room: 3
Q2 = FETP-GSD_0: room: 8
Q3 = NPN-BEC_0: room: 8
Q4 = FETP-GSD_0
Q5 = NPN-BEC_0
Q6 = BPW37/TO_0
R1-R21 R173 = R: room: 2
R22-R27 R30 R31 = Resistor: room: 3
R28 R33 = Resistor_0: room: 3
R29 R32 = R: signal model: R_SR0603_10R_10R; room: 3
R34-R39 = R: room: 4
R40 R52 = R-0603: room: 5
R41-R51 R53-R67 = Resistor: room: 5
R68 = R-0603: room: 6
R69-R86 R88-R104 = Resistor: room: 6
R87 = Resistor: signal model: RESISTOR_SR0402_0R_0R; room: 6
R105-R108 = Resistor: signal model: RESISTOR_SR0402_2R_2R; room: 7
R111-R114 R174 R178 = Resistor: room: 7
R115 R116 = R_0: room: 8
R117 R119 = R-0603: signal model: R-0603_SR0402_0R_0R; room: 8
R118 = R: signal model: DEFAULT_RESISTOR_2000OHM_1_2; room: 8
R120 = R: signal model: DEFAULT_RESISTOR_100.000000OHM_1_2; room: 8
R121 R122 = R: signal model: DEFAULT_RESISTOR_1000.000000OHM_1_2; room: 8
R123-R146 R164 = Resistor: room: 9
R147 R148 = R: room: 10
R149-R151 = R_0: room: 10
R152-R158 = R: room: 11
R159 R160 R162 = R-0603: room: 12
R161 = Resistor: room: 12
R163 R175-R177 = R_6
R165 = R: signal model: DEFAULT_RESISTOR_2000OHM_1_2
R166 = R: signal model: DEFAULT_RESISTOR_10000OHM_1_2
R167 = R: signal model: DEFAULT_RESISTOR_100.000000OHM_1_2
R168 R169 = R: signal model: DEFAULT_RESISTOR_1000.000000OHM_1_2
R170-R172 = R-0603
RN1-RN4 = RESAR_IS_4/SM: Tolerance: TOL; User Part Number: PART#; signal model: RESAR_IS_4/SM_RPAK8-10X25-28V_0_0R; room: 5
RN5-RN8 = 744C083/SM_0: Tolerance: TOL; User Part Number: PART#; signal model: 744C083/SM_0_RPAK8-10X25-28V_0R_0RX4; room: 6
S1 = MSW4_1: room: 7
SW1 = SW TACT-SPST: room: 7
T1 = 000-7090-37R_1: signal model: 000-7090-37R_1_STFM16-50-285_H1_H1102NL; room: 7
TP1 = T POINT A: room: 6
U1-U3 = SGM6230_0: room: 2
U4 = MAX3232E: room: 3
U5 = MAX3485E_0: room: 3
U6 = LT8619B_3: room: 5
U7 = AT24C08: room: 5
U8 = 741G126: room: 5
U9 = 1117_0: room: 5
U10 = GS2971: room: 6
U11 = 1117_0: room: 6
U12 = RTL8188: room: 8
U13 = TLV320AIC31: room: 9
U14 = RT9013: room: 9
U15 = CLAMP0504DL1HP: room: 11
U16 = gf_mxm2_p230h6_0: room: 12
X1 = CRYSTAL_0: room: 5
X2 = Crystal4_1: room: 6

## Footprints (pads in the part's own frame, mm; a bottom-side part is the same pattern mirrored in y, then rotated)
5032
  rect 2.4x1.9 smd: 1(0,2.05) 2(0,-2.05)
AS0B326-S43N_5
  rect 3.048x5.08 smd: (-33.831,-107.427) (34.289,-107.427)
  round 6.096 hole 2.692: (-32.055,-121.92) (31.979,-121.895)
  round 1.118 hole 1.118 unplated: (-30.521,-108.407)
  round 5.6 hole 4.2: (-17.043,-175.895) (16.942,-175.895)
  round 1.626 hole 1.626 unplated: (30.979,-108.407)
  oval 0.305x2.032 smd: 1(-30.161,-111.907) 2(-29.921,-104.907) 3(-29.661,-111.907) 4(-29.421,-104.907) 5(-29.161,-111.907) 6(-28.921,-104.907) 7(-28.661,-111.907) 8(-28.421,-104.907) 9(-28.161,-111.907) 10(-27.921,-104.907) 11(-27.661,-111.907) 12(-27.421,-104.907) 13(-27.161,-111.907) 14(-26.921,-104.907) 15(-26.661,-111.907) 16(-26.421,-104.907) 17(-26.161,-111.907) 18(-25.921,-104.907) 19(-25.661,-111.907) 20(-25.421,-104.907) 21(-25.161,-111.907) 22(-24.921,-104.907) 23(-24.661,-111.907) 24(-24.421,-104.907) 25(-21.161,-111.907) 26(-20.921,-104.907) 27(-20.661,-111.907) 28(-20.421,-104.907) 29(-20.161,-111.907) 30(-19.921,-104.907) 31(-19.661,-111.907) 32(-19.421,-104.907) 33(-19.161,-111.907) 34(-18.921,-104.907) 35(-18.661,-111.907) 36(-18.421,-104.907) 37(-18.161,-111.907) 38(-17.921,-104.907) 39(-17.661,-111.907) 40(-17.421,-104.907) 41(-17.161,-111.907) 42(-16.921,-104.907) 43(-16.661,-111.907) 44(-16.421,-104.907) 45(-16.161,-111.907) 46(-15.921,-104.907) 47(-15.661,-111.907) 48(-15.421,-104.907) 49(-15.161,-111.907) 50(-14.921,-104.907) 51(-14.661,-111.907) 52(-14.421,-104.907) 53(-14.161,-111.907) 54(-13.921,-104.907) 55(-13.661,-111.907) 56(-13.421,-104.907) 57(-13.161,-111.907) 58(-12.921,-104.907) 59(-12.661,-111.907) 60(-12.421,-104.907) 61(-12.161,-111.907) 62(-11.921,-104.907) 63(-11.661,-111.907) 64(-11.421,-104.907) 65(-11.161,-111.907) 66(-10.921,-104.907) 67(-10.661,-111.907) 68(-10.421,-104.907) 69(-10.161,-111.907) 70(-9.921,-104.907) 71(-9.661,-111.907) 72(-9.421,-104.907) 73(-9.161,-111.907) 74(-8.921,-104.907) 75(-8.661,-111.907) 76(-8.421,-104.907) 77(-8.161,-111.907) 78(-7.921,-104.907) 79(-7.661,-111.907) 80(-7.421,-104.907) 81(-7.161,-111.907) 82(-6.921,-104.907) 83(-6.661,-111.907) 84(-6.421,-104.907) 85(-6.161,-111.907) 86(-5.921,-104.907) 87(-5.661,-111.907) 88(-5.421,-104.907) 89(-5.161,-111.907) 90(-4.921,-104.907) 91(-4.661,-111.907) 92(-4.421,-104.907) 93(-4.161,-111.907) 94(-3.921,-104.907) 95(-3.661,-111.907) 96(-3.421,-104.907) 97(-3.161,-111.907) 98(-2.921,-104.907) 99(-2.661,-111.907) 100(-2.421,-104.907) 101(-2.161,-111.907) 102(-1.921,-104.907) 103(-1.661,-111.907) 104(-1.421,-104.907) 105(-1.161,-111.907) 106(-0.921,-104.907) 107(-0.661,-111.907) 108(-0.421,-104.907) 109(-0.161,-111.907) 110(0.079,-104.907) 111(0.339,-111.907) 112(0.579,-104.907) 113(0.839,-111.907) 114(1.079,-104.907) 115(1.339,-111.907) 116(1.579,-104.907) 117(1.839,-111.907) 118(2.079,-104.907) 119(2.339,-111.907) 120(2.579,-104.907) 121(2.839,-111.907) 122(3.079,-104.907) 123(3.339,-111.907) 124(3.579,-104.907) 125(3.839,-111.907) 126(4.079,-104.907) 127(4.339,-111.907) 128(4.579,-104.907) 129(4.839,-111.907) 130(5.079,-104.907) 131(5.339,-111.907) 132(5.579,-104.907) 133(5.839,-111.907) 134(6.079,-104.907) 135(6.339,-111.907) 136(6.579,-104.907) 137(6.839,-111.907) 138(7.079,-104.907) 139(7.339,-111.907) 140(7.579,-104.907) 141(7.839,-111.907) 142(8.079,-104.907) 143(8.339,-111.907) 144(8.579,-104.907) 145(8.839,-111.907) 146(9.079,-104.907) 147(9.339,-111.907) 148(9.579,-104.907) 149(9.839,-111.907) 150(10.079,-104.907) 151(10.339,-111.907) 152(10.579,-104.907) 153(10.839,-111.907) 154(11.079,-104.907) 155(11.339,-111.907) 156(11.579,-104.907) 157(11.839,-111.907) 158(12.079,-104.907) 159(12.339,-111.907) 160(12.579,-104.907) 161(12.839,-111.907) 162(13.079,-104.907) 163(13.339,-111.907) 164(13.579,-104.907) 165(13.839,-111.907) 166(14.079,-104.907) 167(14.339,-111.907) 168(14.579,-104.907) 169(14.839,-111.907) 170(15.079,-104.907) 171(15.339,-111.907) 172(15.579,-104.907) 173(15.839,-111.907) 174(16.079,-104.907) 175(16.339,-111.907) 176(16.579,-104.907) 177(16.839,-111.907) 178(17.079,-104.907) 179(17.339,-111.907) 180(17.579,-104.907) 181(17.839,-111.907) 182(18.079,-104.907) 183(18.339,-111.907) 184(18.579,-104.907) 185(18.839,-111.907) 186(19.079,-104.907) 187(19.339,-111.907) 188(19.579,-104.907) 189(19.839,-111.907) 190(20.079,-104.907) 191(20.339,-111.907) 192(20.579,-104.907) 193(20.839,-111.907) 194(21.079,-104.907) 195(21.339,-111.907) 196(21.579,-104.907) 197(21.839,-111.907) 198(22.079,-104.907) 199(22.339,-111.907) 200(22.579,-104.907) 201(22.839,-111.907) 202(23.079,-104.907) 203(23.339,-111.907) 204(23.579,-104.907) 205(23.839,-111.907) 206(24.079,-104.907) 207(24.339,-111.907) 208(24.579,-104.907) 209(24.839,-111.907) 210(25.079,-104.907) 211(25.339,-111.907) 212(25.579,-104.907) 213(25.839,-111.907) 214(26.079,-104.907) 215(26.339,-111.907) 216(26.579,-104.907) 217(26.839,-111.907) 218(27.079,-104.907) 219(27.339,-111.907) 220(27.579,-104.907) 221(27.839,-111.907) 222(28.079,-104.907) 223(28.339,-111.907) 224(28.579,-104.907) 225(28.839,-111.907) 226(29.079,-104.907) 227(29.339,-111.907) 228(29.579,-104.907) 229(29.839,-111.907) 230(30.079,-104.907)
BGA100P10X10-100N
  round 0.508 smd: A1(-4.5,4.5) A2(-3.5,4.5) A3(-2.5,4.5) A4(-1.5,4.5) A5(-0.5,4.5) A6(0.5,4.5) A7(1.5,4.5) A8(2.5,4.5) A9(3.5,4.5) A10(4.5,4.5) B1(-4.5,3.5) B2(-3.5,3.5) B3(-2.5,3.5) B4(-1.5,3.5) B5(-0.5,3.5) B6(0.5,3.5) B7(1.5,3.5) B8(2.5,3.5) B9(3.5,3.5) B10(4.5,3.5) C1(-4.5,2.5) C2(-3.5,2.5) C3(-2.5,2.5) C4(-1.5,2.5) C5(-0.5,2.5) C6(0.5,2.5) C7(1.5,2.5) C8(2.5,2.5) C9(3.5,2.5) C10(4.5,2.5) D1(-4.5,1.5) D2(-3.5,1.5) D3(-2.5,1.5) D4(-1.5,1.5) D5(-0.5,1.5) D6(0.5,1.5) D7(1.5,1.5) D8(2.5,1.5) D9(3.5,1.5) D10(4.5,1.5) E1(-4.5,0.5) E2(-3.5,0.5) E3(-2.5,0.5) E4(-1.5,0.5) E5(-0.5,0.5) E6(0.5,0.5) E7(1.5,0.5) E8(2.5,0.5) E9(3.5,0.5) E10(4.5,0.5) F1(-4.5,-0.5) F2(-3.5,-0.5) F3(-2.5,-0.5) F4(-1.5,-0.5) F5(-0.5,-0.5) F6(0.5,-0.5) F7(1.5,-0.5) F8(2.5,-0.5) F9(3.5,-0.5) F10(4.5,-0.5) G1(-4.5,-1.5) G2(-3.5,-1.5) G3(-2.5,-1.5) G4(-1.5,-1.5) G5(-0.5,-1.5) G6(0.5,-1.5) G7(1.5,-1.5) G8(2.5,-1.5) G9(3.5,-1.5) G10(4.5,-1.5) H1(-4.5,-2.5) H2(-3.5,-2.5) H3(-2.5,-2.5) H4(-1.5,-2.5) H5(-0.5,-2.5) H6(0.5,-2.5) H7(1.5,-2.5) H8(2.5,-2.5) H9(3.5,-2.5) H10(4.5,-2.5) J1(-4.5,-3.5) J2(-3.5,-3.5) J3(-2.5,-3.5) J4(-1.5,-3.5) J5(-0.5,-3.5) J6(0.5,-3.5) J7(1.5,-3.5) J8(2.5,-3.5) J9(3.5,-3.5) J10(4.5,-3.5) K1(-4.5,-4.5) K2(-3.5,-4.5) K3(-2.5,-4.5) K4(-1.5,-4.5) K5(-0.5,-4.5) K6(0.5,-4.5) K7(1.5,-4.5) K8(2.5,-4.5) K9(3.5,-4.5) K10(4.5,-4.5)
BNC_73171-0700
  rect 2.007x2.007 hole 1.295: 1(0,0)
  oval 2.413x2.997 hole 1.397: 2(4,4) 3(-4,4) 4(-4,-4) 5(4,-4)
C0402
  rect 0.508x0.508 smd: 1(-0.406,0) 2(0.406,0)
CAPC2-100-250
  rect 1.397x1.778 hole 0.813: 1(0,0)
  oval 1.397x1.778 hole 0.813: 2(2.54,0)
CON1X3PD2
  rect 1.35x1.35 hole 0.85: 1(0,0)
  round 1.35 hole 0.85: 2(2,0) 3(4,0)
CON3X1
  round 1.6 hole 1: 1(-2.54,0) 2(0,0) 3(2.54,0)
CR2032-SMT
  rect 3.05x3.4 smd: 1(11.575,0)
  rect 4.5x2.4 smd: 2(-9.6,0)
DB15-3RF-A
  round 1.372 hole 1.016: 1(0,0) 2(-2.286,0) 3(-4.572,0) 4(-6.858,0) 5(-9.144,0) 6(1.143,-2.54) 7(-1.143,-2.54) 8(-3.429,-2.54) 9(-5.715,-2.54) 10(-8.001,-2.54) 11(0,-5.08) 12(-2.286,-5.08) 13(-4.572,-5.08) 14(-6.858,-5.08) 15(-9.144,-5.08)
  round 4.572 hole 3.302: 16(-16.789,-2.54) 17(8.204,-2.54)
DC552X
  round 1.6 hole 1.6: (0,3.25)
  round 2.4 hole 1.4: 1(0,-6)
  oval 4.5x2 hole 3x0.8: 2(0,0)
  oval 1.6x3 hole 0.8x2: 3(4.75,0.5) 4(-4.75,0.5) 5(4.75,-4.2) 6(-4.75,-4.2)
DFN2510
  oval 0.2x0.4 smd: 1(-1,-0.3) 2(-0.5,-0.3) 4(0.5,-0.3) 5(1,-0.3) 6(1,0.3) 7(0.5,0.3) 9(-0.5,0.3) 10(-1,0.3)
  rect 0.4x0.4 smd: 3(0,-0.3) 8(0,0.3)
DIP_LEDX2
  round 1.8 hole 1.2: 1(-2.54,-1.27) 2(-2.54,1.27) 3(0,-1.27) 4(0,1.27)
DJH-WF-68E
  rect 1.5x1 smd: 1(2.9,12.3) 2(5.38,12.3) 3(8.88,12.3) 4(11.7,12.3) 5(2.43,0) 6(4.4,0)
HDMI_19P-QJ3119CH16_4A
  round 1.7 hole 1.7 unplated: (-1.66,-1.5) (11.59,2)
  oval 0.7x1.05 hole 0.55: 1(0.24,-0.5) 2(0.818,0.5) 3(1.395,-0.5) 4(1.973,0.5) 5(2.55,-0.5) 6(3.128,0.5) 7(3.705,-0.5) 8(4.283,0.5) 9(4.86,-0.5) 10(5.438,0.5) 11(6.015,-0.5) 12(6.593,0.5) 13(7.17,-0.5) 14(7.748,0.5) 15(8.325,-0.5) 16(8.903,0.5) 17(9.48,-0.5) 18(10.058,0.5) 19(10.635,-0.5)
  oval 2.9x1.55 hole 2.25x0.9: 20(11.59,-3.25) 21(8.49,3.25) 22(-0.51,3.25) 23(2.09,-3.25)
HOLE5C2_8MM
  round 5 hole 2.8: 1(0,0)
HSL1008
  rect 0.94x1.905 smd: 1(-1.029,0) 2(1.029,0)
HSOD882
  rect 0.406x0.483 smd: 1(-0.325,0) 2(0.325,0)
IPEX
  rect 1.1x1.1 smd: 1(1.7,0)
  rect 2.2x1.1 smd: 2(0,1.5) 3(0,-1.5)
LED0603
  rect 0.711x0.813 smd: A(0.737,0) C(-0.737,0)
MJ8-SRLFY
  round 3.429 hole 3.429 unplated: (-2.794,2.54) (9.906,2.54)
  round 1.27 hole 0.914: 1(0,0) 2(1.016,-1.778) 3(2.032,0) 4(3.048,-1.778) 5(4.064,0) 6(5.08,-1.778) 7(6.096,0) 8(7.112,-1.778) 13(-3.302,-6.604) 14(-1.016,-6.604) 15(8.128,-6.604) 16(10.414,-6.604)
  round 2.159 hole 1.651: 11(-4.508,-0.889) 12(11.62,-0.889)
MLF32-050-0505LE
  oval 0.254x0.635 smd: 1(-1.75,-2.362) 8(1.75,-2.362) 17(1.75,2.362) 24(-1.75,2.362)
  rect 0.254x0.635 smd: 2(-1.25,-2.362) 3(-0.75,-2.362) 4(-0.25,-2.362) 5(0.25,-2.362) 6(0.75,-2.362) 7(1.25,-2.362) 18(1.25,2.362) 19(0.75,2.362) 20(0.25,2.362) 21(-0.25,2.362) 22(-0.75,2.362) 23(-1.25,2.362)
  oval 0.635x0.254 smd: 9(2.362,-1.75) 16(2.362,1.75) 25(-2.362,1.75) 32(-2.362,-1.75)
  rect 0.635x0.254 smd: 10(2.362,-1.25) 11(2.362,-0.75) 12(2.362,-0.25) 13(2.362,0.25) 14(2.362,0.75) 15(2.362,1.25) 26(-2.362,1.25) 27(-2.362,0.75) 28(-2.362,0.25) 29(-2.362,-0.25) 30(-2.362,-0.75) 31(-2.362,-1.25)
  rect 3.454x3.454 smd: 33(0,0)
PH-3P
  rect 1.35x1.35 hole 0.85: 1(0,0)
  round 1.35 hole 0.85: 2(2,0) 3(4,0)
PH-4P
  rect 1.35x1.35 hole 0.85: 1(0,0)
  round 1.35 hole 0.85: 2(2,0) 3(4,0) 4(6,0)
PJ-313
  round 1.6 hole 1.6: (0,6) (0,0)
  rect 1.2x2.06 hole 0.8x1.3: 1(-3.4,-0.7) 2(3.5,-0.7) 4(3.5,5.7) 5(-3.4,2.5) 6(-3.4,5.7)
QFN77BH10
  oval 1.016x0.203 smd: 1(-4.373,3.6) 2(-4.373,3.2) 3(-4.373,2.8) 4(-4.373,2.4) 5(-4.373,2) 6(-4.373,1.6) 7(-4.373,1.2) 8(-4.373,0.8) 9(-4.373,0.4) 10(-4.373,0) 11(-4.373,-0.4) 12(-4.373,-0.8) 13(-4.373,-1.2) 14(-4.373,-1.6) 15(-4.373,-2) 16(-4.373,-2.4) 17(-4.373,-2.8) 18(-4.373,-3.2) 19(-4.373,-3.6) 39(4.373,-3.6) 40(4.373,-3.2) 41(4.373,-2.8) 42(4.373,-2.4) 43(4.373,-2) 44(4.373,-1.6) 45(4.373,-1.2) 46(4.373,-0.8) 47(4.373,-0.4) 48(4.373,0) 49(4.373,0.4) 50(4.373,0.8) 51(4.373,1.2) 52(4.373,1.6) 53(4.373,2) 54(4.373,2.4) 55(4.373,2.8) 56(4.373,3.2) 57(4.373,3.6)
  oval 0.203x1.016 smd: 20(-3.6,-4.373) 21(-3.2,-4.373) 22(-2.8,-4.373) 23(-2.4,-4.373) 24(-2,-4.373) 25(-1.6,-4.373) 26(-1.2,-4.373) 27(-0.8,-4.373) 28(-0.4,-4.373) 29(0,-4.373) 30(0.4,-4.373) 31(0.8,-4.373) 32(1.2,-4.373) 33(1.6,-4.373) 34(2,-4.373) 35(2.4,-4.373) 36(2.8,-4.373) 37(3.2,-4.373) 38(3.6,-4.373) 58(3.6,4.373) 59(3.2,4.373) 60(2.8,4.373) 61(2.4,4.373) 62(2,4.373) 63(1.6,4.373) 64(1.2,4.373) 65(0.8,4.373) 66(0.4,4.373) 67(0,4.373) 68(-0.4,4.373) 69(-0.8,4.373) 70(-1.2,4.373) 71(-1.6,4.373) 72(-2,4.373) 73(-2.4,4.373) 74(-2.8,4.373) 75(-3.2,4.373) 76(-3.6,4.373)
  rect 5.588x5.588 smd: 77(0,0)
R0402
  rect 0.508x0.508 smd: 1(-0.406,0) 2(0.406,0)
RPAK8-10X25-28V
  rect 0.406x0.635 smd: 1(-0.823,-0.521) 4(0.823,-0.521) 5(0.823,0.521) 8(-0.823,0.521)
  rect 0.254x0.635 smd: 2(-0.249,-0.521) 3(0.249,-0.521) 6(0.249,0.521) 7(-0.249,0.521)
SAC6666
  rect 3.175x1.016 smd: 1(-2.5,0) 2(2.5,0)
SATA7-M-A
  rect 0.889x2.413 smd: 1(-3.96,-0.825) 2(-2.69,-0.825) 3(-1.42,-0.825) 4(-0.15,-0.825) 5(1.12,-0.825) 6(2.39,-0.825) 7(3.66,-0.825)
  round 2.413 hole 1.5: 8(-6.42,0.275) 9(6.41,-0.725)
SC0402
  rect 0.508x0.508 smd: 1(-0.406,0) 2(0.406,0)
SC0603
  rect 0.762x0.813 smd: 1(-0.699,0) 2(0.699,0)
SC0805
  rect 0.991x1.27 smd: 1(-0.813,0) 2(0.813,0)
SC1206
  rect 1.295x1.651 smd: 1(-1.346,0) 2(1.346,0)
SD0805-LED
  rect 1.27x1.397 smd: 1(-1.016,0) 2(1.016,0)
SF1206
  rect 1.295x1.651 smd: 1(-1.346,0) 2(1.346,0)
SIP-4P-200
  rect 3.048x3.048 hole 2.032: 1(-7.62,0.127)
  round 3.048 hole 2.032: 2(-2.54,0.127) 3(2.54,0.127) 4(7.62,0.127)
SL0603
  rect 0.94x0.889 smd: 1(-0.762,0) 2(0.762,0)
SL0805
  rect 0.94x1.27 smd: 1(-0.851,0) 2(0.851,0)
SMA
  round 2.286 smd: 1(-2.032,0) 2(2.032,0)
SMA_KE_180_CVBS
  round 2.5 hole 1.5: (-2.54,-2.54) (2.54,2.54) (2.54,-2.54) 1(0,0) 2(-2.54,2.54)
SMB
  rect 2.032x2.032 smd: 1(-2.3,0) 2(2.3,0)
SOD323
  rect 0.61x0.508 smd: 1(-1.245,0) 2(1.245,0)
SOD-323
  rect 1.194x1.194 smd: 1(-1.295,0) 2(1.295,0)
SOIC-8
  rect 0.61x1.91 smd: 1(-1.905,-2.78) 2(-0.635,-2.78) 3(0.635,-2.78) 4(1.905,-2.78) 5(1.905,2.78) 6(0.635,2.78) 7(-0.635,2.78) 8(-1.905,2.78)
  rect 3.302x2.413 smd: 9(0,0)
SOP8
  rect 1.55x0.6 smd: 1(-2.7,1.905) 2(-2.7,0.635) 3(-2.7,-0.635) 4(-2.7,-1.905) 5(2.7,-1.905) 6(2.7,-0.635) 7(2.7,0.635) 8(2.7,1.905)
SOP8-50-150
  rect 0.635x1.778 smd: 1(-1.905,-2.667) 2(-0.635,-2.667) 3(0.635,-2.667) 4(1.905,-2.667) 5(1.905,2.667) 6(0.635,2.667) 7(-0.635,2.667) 8(-1.905,2.667)
SOP16
  oval 1.905x0.61 smd: 1(0,0) 2(0,-1.27) 3(0,-2.54) 4(0,-3.81) 5(0,-5.08) 6(0,-6.35) 7(0,-7.62) 8(0,-8.89) 9(5.588,-8.89) 10(5.588,-7.62) 11(5.588,-6.35) 12(5.588,-5.08) 13(5.588,-3.81) 14(5.588,-2.54) 15(5.588,-1.27) 16(5.588,0)
SOT23
  rect 0.8x0.9 smd: 1(-0.95,-1) 2(0.95,-1) 3(0,1)
SOT23-5
  rect 0.6x1 smd: 1(-0.94,-1.4) 2(0,-1.4) 3(0.94,-1.4) 4(0.94,1.4) 5(-0.94,1.4)
SOT23-6J
  rect 0.508x1.27 smd: 1(-0.95,-1.385) 2(0,-1.385) 3(0.95,-1.385) 4(0.95,1.385) 5(0,1.385) 6(-0.95,1.385)
SOT-223
  rect 2.15x0.95 smd: 1(-2.9,2.3) 2(-2.9,0) 3(-2.9,-2.3)
  rect 2.15x3.25 smd: 4(2.9,0)
SR0402
  rect 0.508x0.508 smd: 1(-0.406,0) 2(0.406,0)
SR0603
  rect 0.711x0.813 smd: 1(-0.737,0) 2(0.737,0)
STFM16-50-285
  rect 0.635x1.905 smd: 1(-4.445,-4.381) 2(-3.175,-4.381) 3(-1.905,-4.381) 4(-0.635,-4.381) 5(0.635,-4.381) 6(1.905,-4.381) 7(3.175,-4.381) 8(4.445,-4.381) 9(4.445,4.381) 10(3.175,4.381) 11(1.905,4.381) 12(0.635,4.381) 13(-0.635,4.381) 14(-1.905,4.381) 15(-3.175,4.381) 16(-4.445,4.381)
SW3X6
  rect 1.5x1.5 smd: 1(-4,0) 2(4,0)
SW_90
  round 1.5 hole 1: 1(1.5,2.25) 2(1.5,-2.25)
  rect 2.8x1.8 hole 2x1.2: 3(-1,3.5) 4(-1,-3.5)
TP
  round 0.9 smd: 1(0,0)
TVS0402
  rect 0.5x0.6 smd: 1(-0.45,0) 2(0.45,0)
USB8-1715
  rect 1.397x1.397 hole 1.016: 1(0,0)
  round 1.397 hole 1.016: 2(2.5,0) 3(4.5,0) 4(7,0) 5(0,2.62) 6(2.5,2.62) 7(4.5,2.62) 8(7,2.62)
  round 3.048 hole 2.286: 9(-3.07,-2.71) 10(10.07,-2.71) 11(-3.07,2.97) 12(10.07,2.97)
XT3225
  rect 1.295x1.092 smd: 1(-1.143,-0.94) 2(1.143,-0.94) 3(1.143,0.94) 4(-1.143,0.94)

## Nets
1V8_8619C: C46.1 C47.1 C48.1 LB3.1 LB5.1 U9.2(VOUT) U9.4(PAD)
3V3_8619C: C38.2 C39.1 C41.1 C42.1 C43.1 LB2.1 LB4.1 LB6.1 LB7.1 LB8.2 R53.1 R55.1 R56.1 R57.2 R64.2 R65.2 R66.2 U7.8(VDD) U8.5(VCC)
3V3_BD: C13.1 C14.1 C19.1 C34.1(A) C44.1 C45.1 C49.1 C83.1 C92.1 C107.1(A) C141.1 D27.2(A) L2.2 LB1.1 LB8.1 LB10.1 LB12.1 LB13.1 Q2.2(S) R10.1 R11.2 R28.2 R113.1 R114.1 R118.1(A) R132.1 R133.1 R141.1 R147.1(A) R148.1(A) R149.1(A) R150.1(A) R163.1(A) R174.2 R175.1(A) R178.2 U5.8(VCC) U9.3(VIN) U11.3(VIN) U14.1(VIN) U14.3(EN)
3V3_SDI: C79.1 C80.1 C81.1 C82.1 C89.1 LB10.2 LB11.1 R70.1 R71.1 R72.1 R73.1 R74.1 R76.1 R77.1 R78.1 R79.1 R80.1 R81.1 R82.1 R83.1 R84.1 R85.1 R86.1 R100.1 U10.A7(IO_VDD1) U10.D10(IO_VDD2) U10.G10(IO_VDD3) U10.K7(IO_VDD4)
3V3_SDI_A: C75.1 C90.1 C91.1 LB11.2 U10.B1(A_VDD) U10.E1(SDI_VDD) U10.H1(BUF_VDD)
3V3_WIFI: C108.1 Q2.3(D) U12.4(3V3)
5V0_BD: C21.1 C22.1 C27.1 C154.1(A) C161.1(A) C164.1(A) D14.2(A1) F2.1 F3.1 J5.18(+5V) L3.2 LB17.1 LB18.1 Q4.2(S) R17.1 R18.2 R37.2 R38.2 R165.1(A)
5V0_USB2_0: C104.1 C105.1 C106.1 F2.2 J8.5(B1) R116.1(A)
5V0_USB2_2: C101.1 C102.1 C103.1 F3.2 J8.1(A1) R115.1(A)
GND: ANT1.2(G1) ANT1.3(G2) BT2.2(-) C2.2 C3.2 C4.2 C5.2 C6.2 C8.2 C9.2 C10.2 C11.2 C13.2 C14.2 C15.2 C16.2 C17.2 C19.2 C21.2 C22.2 C23.2 C24.2 C25.2 C27.2 C28.1 C30.2 C32.2 C33.2 C34.2(B) C35.2 C36.1 C37.1 C38.1 C39.2 C40.2 C41.2 C42.2 C43.2 C44.2 C45.2 C46.2 C47.2 C48.2 C49.2 C50.2 C51.2 C52.2 C53.2 C54.2 C55.2 C56.2 C57.2 C58.2 C59.2 C60.2 C61.2 C62.2 C63.2 C64.1 C65.1 C66.2 C67.2 C68.2 C70.2 C73.2 C74.2 C75.2 C76.2 C77.2 C78.2 C79.2 C80.2 C81.2 C82.2 C83.2 C84.2 C85.2 C86.2 C87.2 C88.2 C89.2 C90.2 C91.2 C92.2 C93.2 C95.1 C96.1 C99.2 C100.2 C101.2 C102.2 C103.2 C104.2 C105.2 C106.2 C108.2 C109.2 C111.2 C113.2 C115.1 C116.2 C117.1 C119.1 C121.2 C123.1 C124.2 C125.1 C126.1 C127.2 C128.2 C129.2 C130.2 C131.2 C132.2 C133.2 C134.2 C135.2 C136.2 C137.2 C138.2 C139.2 C140.2 C141.2 C142.2 C143.2 C152.2(B) C153.2(B) C155.2(B) C156.2 C157.2(B) C158.2(B) C159.2 C160.2(B) C161.2(B) C162.2 C163.2(B) C164.2(B) C165.2 C166.2(B) C167.2(B) C168.2(B) C169.2(B) D1.1(ANODE) D2.C(CATHODE) D4.2(A) D5.2 D7.1(ANODE) D8.C(CATHODE) D9.1(ANODE) D10.C(CATHODE) D11.2(B) D12.2(B) D13.3(A) D15.2 D16.2 D17.2 D18.2 D19.2 D20.3(A) D21.3(A) D22.3(A) D25.2(C2) D26.2(B) ESD1.3 ESD1.8 ESD2.3 ESD2.8 ESD3.3 ESD3.8 ESD4.3 ESD4.8 ESD5.3 ESD5.8 ESD6.3 ESD6.8 J1.2 J2.2 J3.3 J4.2(D2_SHIELD) J4.5(D1_SHIELD) J4.8(D0_SHIELD) J4.11(DC_SHIELD) J4.17(GND) J4.20(SHELL#20) J4.21(SHELL#21) J4.22(SHELL#22) J4.23(SHELL#23) J5.2(D2_SHIELD) J5.5(D1_SHIELD) J5.8(D0_SHIELD) J5.11(DC_SHIELD) J5.17(GND) J5.20(SHELL#20) J5.21(SHELL#21) J5.22(SHELL#22) J5.23(SHELL#23) J6.2(G1) J6.3(G2) J6.4(G3) J6.5(G4) J7.11(SHIELD1) J7.12(SHIELD2) J8.4(A4) J8.8(B4) J8.9(S1) J8.10(S2) J8.11(S3) J8.12(S4) J9.1 J10.2 J11.1 J12.1(P1) J12.4(P4) J12.7(P7) J12.8(S1) J12.9(S2) J13.1(P1) J13.4(P4) J13.7(P7) J13.8(S1) J13.9(S2) J14.2 J15.2(A2) J15.3(A3) J16.2(A2) J16.3(A3) J17.5(DDCGND) J17.6(R_GND) J17.7(G_GND) J17.8(B_GND) J17.10(L_GND) J17.16(M1) J17.17(M2) J18.2(P2) JP1.2 JP1.3 JP1.4 JP1.5 JP1.6 Q1.2(E) Q3.2(E) Q5.2(E) Q6.2(E) R5.2 R6.2 R7.2 R12.2 R13.2 R14.2 R19.2 R20.2 R21.2 R34.1 R39.2 R42.2 R49.2 R54.1 R75.1 R88.2 R89.2 R90.2 R91.2 R93.2 R94.2 R95.2 R96.2 R97.2 R98.2 R99.2 R102.2 R103.2 R104.2 R115.2(B) R116.2(B) R122.2(B) R138.2 R155.2(B) R156.2(B) R157.2(B) R166.2(B) R169.2(B) R172.2 R173.2 S1.1 S1.3 S1.4 SW1.1 U1.4(GND) U1.9(G) U2.4(GND) U2.9(G) U3.4(GND) U3.9(G) U4.15(GND) U5.5(GND) U6.77(EPAD) U7.1(A0) U7.2(A1) U7.3(A2) U7.4(VSS) U8.3(GND) U9.1(GND) U10.B4(VCO_GND) U10.B7(IO_GND1) U10.C2(A_GND1) U10.D2(A_GND2) U10.D3(A_GND3) U10.D4(PLL_GND1) U10.D5(CORE_GND1) U10.D9(IO_GND2) U10.E2(SDI_GND) U10.E3(A_GND4) U10.E4(PLL_GND2) U10.E5(CORE_GND2) U10.F3(A_GND5) U10.F4(PLL_GND3) U10.F5(CORE_GND3) U10.G2(A_GND0) U10.G4(CORE_GND0) U10.G5(CORE_GND4) U10.G9(IO_GND3) U10.H2(BUF_GND) U10.J7(IO_GND4) U11.1(GND) U12.1(GND) U12.5(GND5) U13.6(DVSS) U13.17(AVSS1) U13.21(DRVSS) U13.26(AVSS2) U13.33(SINK) U14.2(GND) U15.2 U16.1 U16.4 U16.7 U16.13 U16.14 U16.19 U16.24 U16.25 U16.26 U16.30 U16.33 U16.34 U16.37 U16.38 U16.41 U16.44 U16.45 U16.48 U16.51 U16.54 U16.57 U16.60 U16.63 U16.66 U16.69 U16.74 U16.75 U16.81 U16.82 U16.88 U16.91 U16.94 U16.100 U16.101 U16.106 U16.107 U16.112 U16.113 U16.117 U16.118 U16.123 U16.124 U16.129 U16.130 U16.135 U16.136 U16.141 U16.142 U16.145 U16.148 U16.149 U16.154 U16.155 U16.160 U16.161 U16.166 U16.167 U16.172 U16.173 U16.178 U16.179 U16.184 U16.185 U16.190 U16.191 U16.193 U16.195 U16.196 U16.197 U16.199 U16.201 U16.202 U16.217 U16.218 U16.219 U16.220 U16.221 U16.222 U16.223 U16.224 U16.225 U16.226 U16.227 U16.228 U16.229 U16.230 X1.2 X1.4
GND_EARTH: C98.1
PVCC18: C58.1 C59.1 C60.1 C61.1 LB3.2 U6.25(VDD18#25) U6.58(VDD18#58) U6.59(PVCC18) U6.67(VDD18#67)
V232C_3V3: C28.2 C30.1 LB1.2 R24.1 R25.1 U4.16(VCC)
VBAT: R161.2 U16.115
VCC33: C52.1 C53.1 LB4.2 U6.20(VCC33#20) U6.64(VCC33#64)
VCC33_TTL: C54.1 C55.1 LB6.2 U6.36(VCCA33_TTL) U6.57(VCC33_TTL)
VCC33_VTERM: C56.1 C57.1 LB7.2 U6.4(VTERM#4) U6.10(VTERM#10)
VCCA18: C62.1 C63.1 LB5.2 U6.1(VCCA18#1) U6.13(VCCA18#13)
VCCA33: C50.1 C51.1 LB2.2 U6.7(VCCA33) U6.62(VCCA33_XTAL)
VIN12: F1.1 JP1.1
VIN_3V3: C2.1 C3.1 C8.1 L1.2 R3.1 R4.2 R159.2 R160.2 U16.125 U16.127 U16.203 U16.204 U16.205 U16.206 U16.207 U16.208 U16.209 U16.210 U16.211 U16.212 U16.213 U16.214 U16.215 U16.216
VIN_12V: C4.1 C9.1 C10.1 C11.1 C15.1 C23.1 C155.1(A) C158.1(A) D3.1(K) D5.1 D6.1 D6.3 LB15.1 LB16.1 R1.1 R8.1 R16.1 U1.2(IN) U2.2(IN) U3.2(IN)
1: J7.1(A1) R105.2
2: J7.2(A2) R106.2
3: J7.3(A3) R107.2
6: J7.6(A6) R108.2
13: J7.13(LED-_G) R176.1(A)
14: J7.14(LED+_G) R174.1
15: J7.15(LED-_Y) R177.1(A)
16: J7.16(LED+_Y) R178.1
485_A: D13.2(C2) J3.1 R32.2(B)
485_B: D13.1(C1) J3.2 R29.2(B)
AUDIOIN_L: C122.2 C135.1 R139.2
AUDIOIN_R: C120.2 C134.1 R140.2
AUDIOOUT_L: D20.2(C2) J9.5 R124.2 R129.1
AUDIOOUT_R: D20.1(C1) J9.6 R123.1 R125.2
CLK_AIC31: R146.1 U13.1(MCLK)
CVBS: R158.1(A) U16.46
GPIO0_0: R70.2 U10.F8(SCLK_TCK) U16.16
GPIO0_1: R71.2 U10.E8(SDIN_TDI) U16.18
GPIO0_2: R73.2 U10.F7(C\S\_TMS) U16.22
GPIO0_3: R72.2 U10.E7(SDOUT_TDO) U16.20
GPIO0_4: R143.1 U16.10
GPIO0_5: R92.1 U16.12
GPIO0_6: R121.1(A) R122.1(A) U16.8
GPIO0_7: C100.1 R114.2 S1.2 U16.6
GPIO1_0: R67.2 U16.2
GPIO1_1/BOOT_SEL1: U16.83
GPIO1_2/BOOT_SEL0: U16.85
GPIO1_3/FAST_BOOT_MODE: U16.109
GPIO1_4/SFC_EMMC_BOOT_MODE: U16.111
GPIO10_4: U16.194
HDMI_5V_DET: R45.1 R48.2 R49.1
HDMI_INA_5V_R: Q4.3(D) R48.1 R51.1 R166.1(A)
I2C0_SCL: R44.1 U16.50
I2C0_SDA: R43.1 U16.52
I2C1_SCL: R132.2 R135.1 U16.56
I2C1_SDA: R133.2 R137.1 U16.58
I2S0_BCLK_R: R142.2 U16.62
I2S0_MCLK_R: R146.2 U16.64
I2S0_SD_RX: R144.2 U16.70
I2S0_SD_TX: R145.2 U16.68
I2S0_WS: R164.2 U16.72
I2S1_BCLK_R: R62.1 U16.80
I2S1_SD_RX: R60.1 U16.76
I2S1_WS: R61.1 U16.78
I2S_AIC31_BCLK: R142.1 U13.2(BCLK)
I2S_AIC31_DIN: R145.1 U13.4(DIN)
I2S_AIC31_DOUT: R144.1 U13.5(DOUT)
I2S_AIC31_WCLK: R164.1 U13.3(WCLK)
IIS_MCLK: R63.2 U6.23(IIS_MCLK)
IIS_SCLK_R: R62.2 U6.22(IIS_SCLK)
IIS_SD0: R60.2 U6.19(IIS_SD0/SPDIF)
IIS_WS: R61.2 U6.21(IIS_WS)
IR_IN/SPI1_SCK: R151.2(B) U16.147
JTAG_TCK/SPI1_MOSI: J19.4 U16.143
JTAG_TDI/UART2_RXD: J19.1 U16.133
JTAG_TDO_R/UART2_TXD: R171.1 U16.131
JTAG_TMS/SPI1_MISO: J19.2 U16.137
JTAG_TRSTN/SPI1_CSN: J19.3 U16.139
LAN_LED_ACT: R175.2(B) R177.2(B) U16.87
LAN_LED_LINK: R163.2(B) R176.2(B) U16.89
LED_G: D6.4 R170.1
MDI_AN: T1.8(RD-) U16.79
MDI_AP: T1.6(RD+) U16.77
MDI_BN: T1.3(TD-) U16.73
MDI_BP: T1.1(TD+) U16.71
MICBIAS_AIC31: C111.1 C113.1 R126.1 U13.15(MICBIAS)
